# Allegro board mainboard.brd
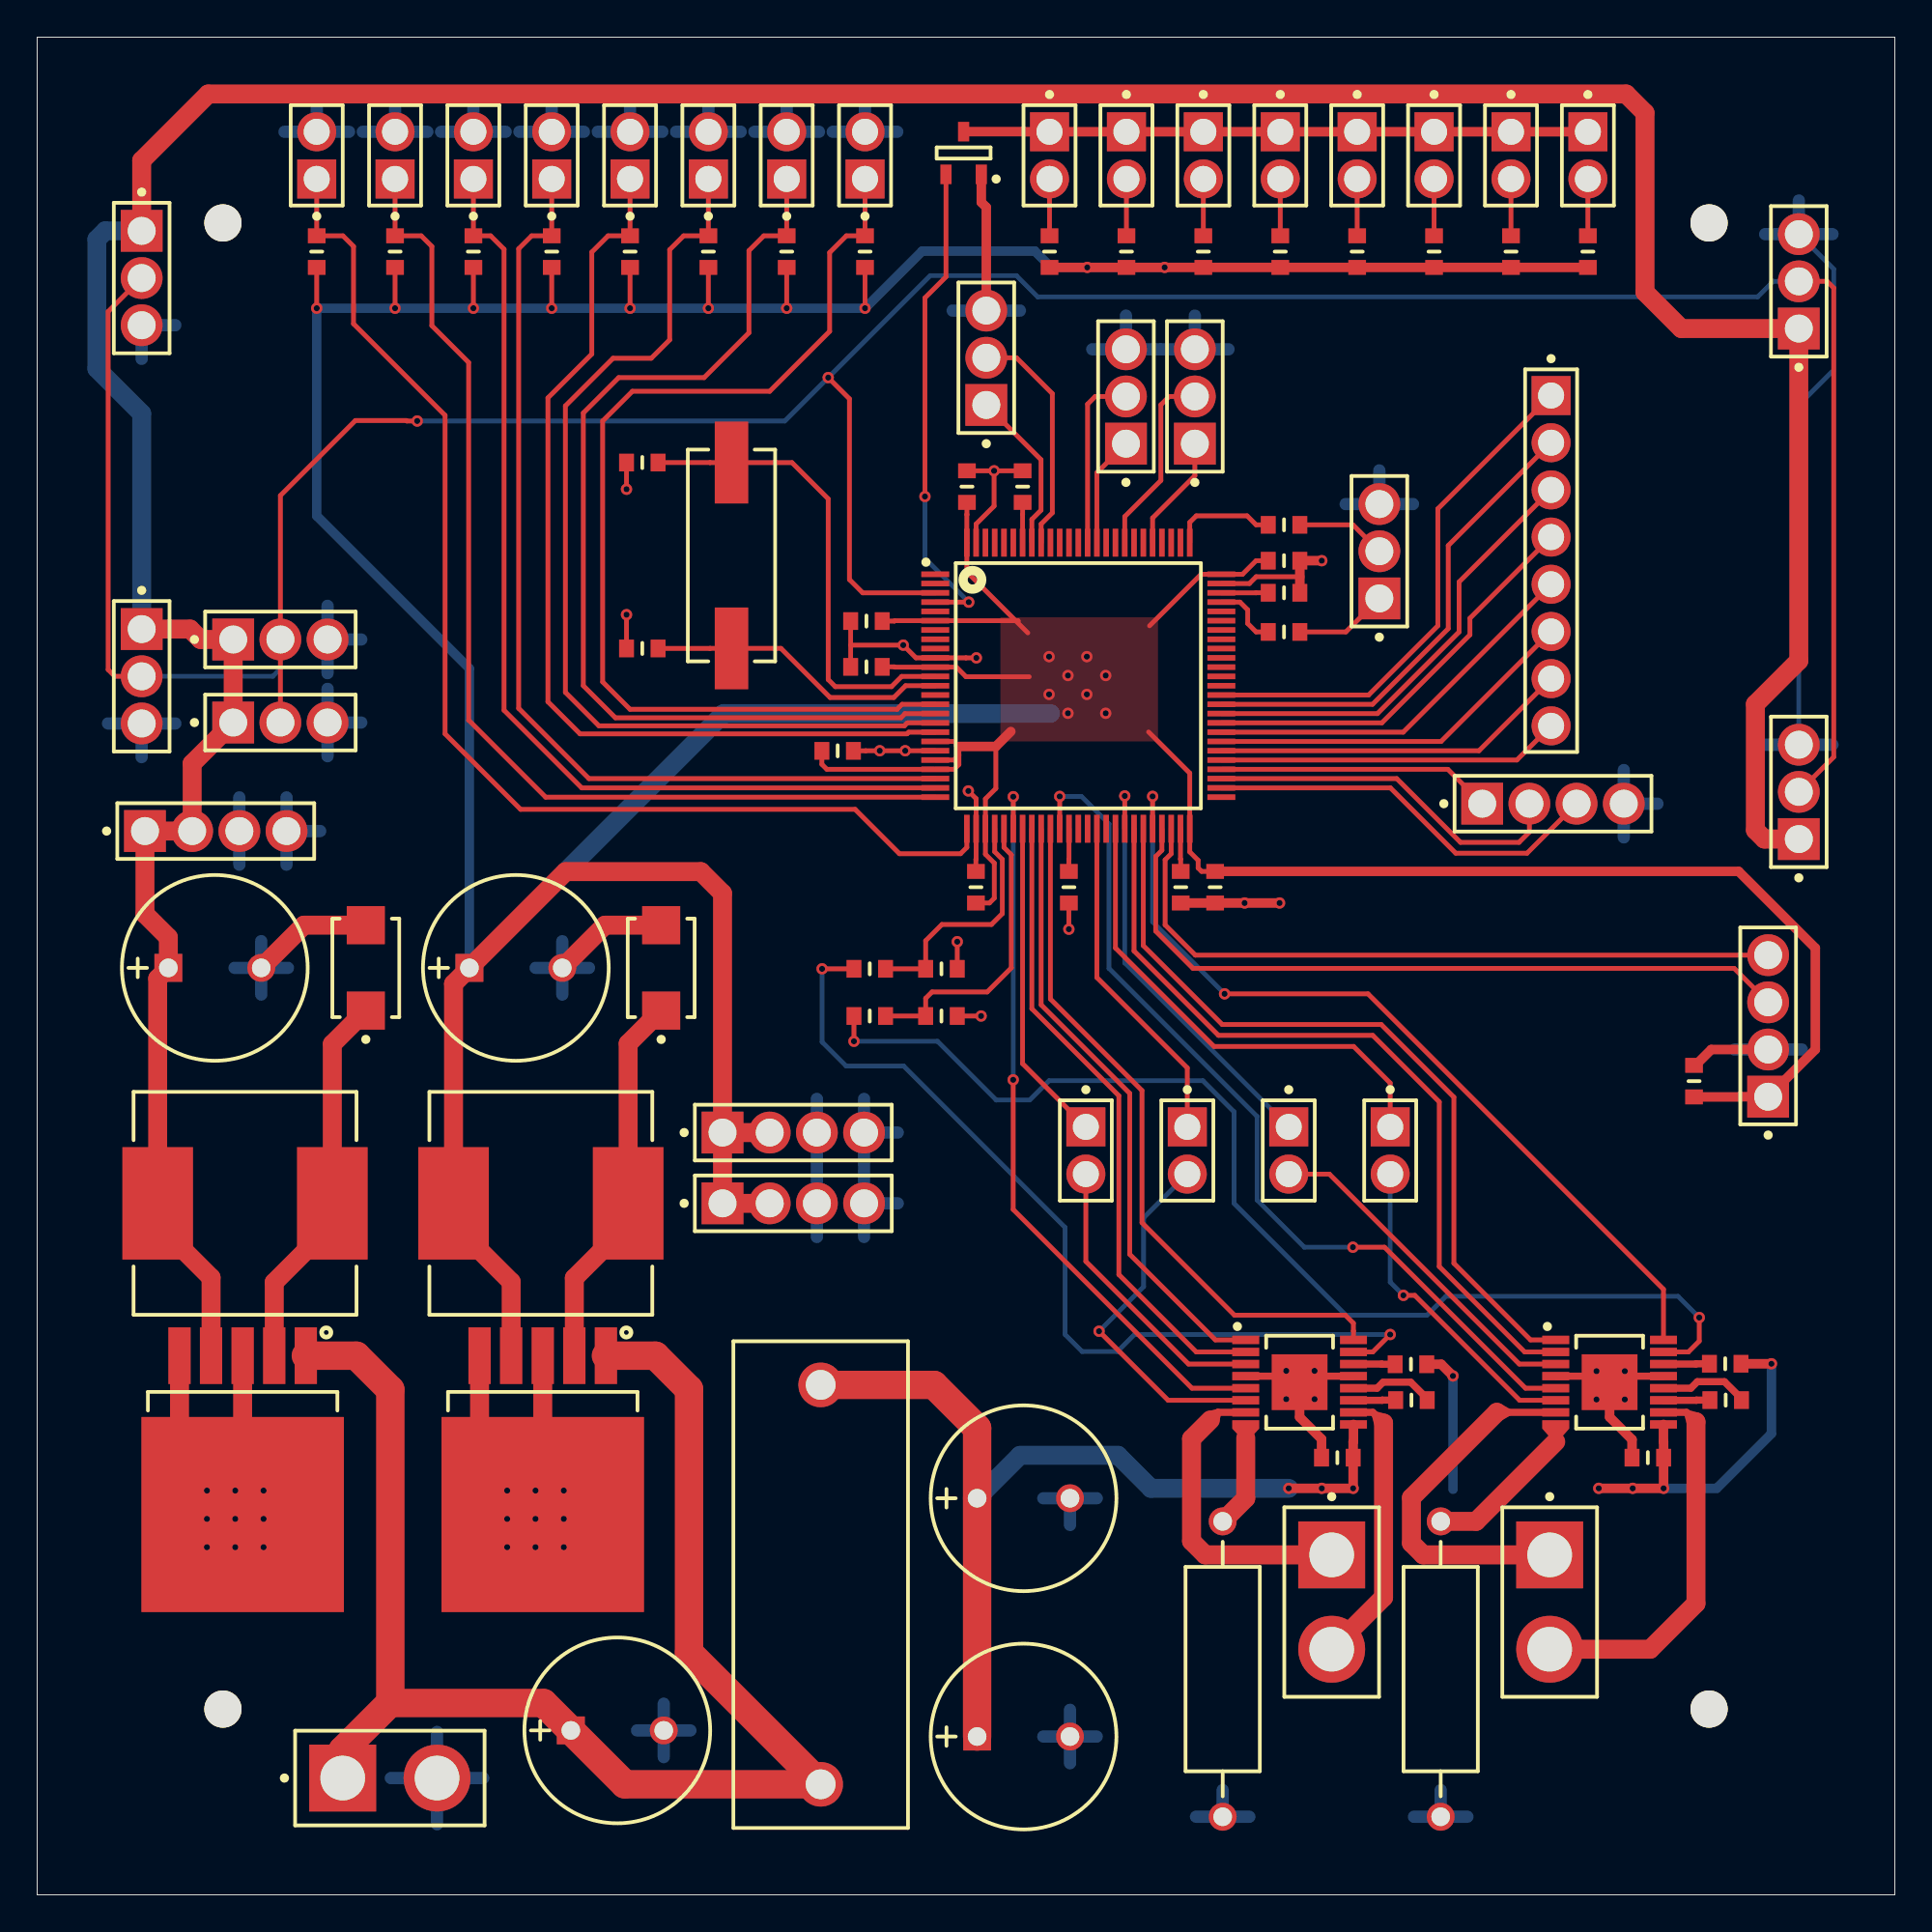
[diagram p0: board, top side]
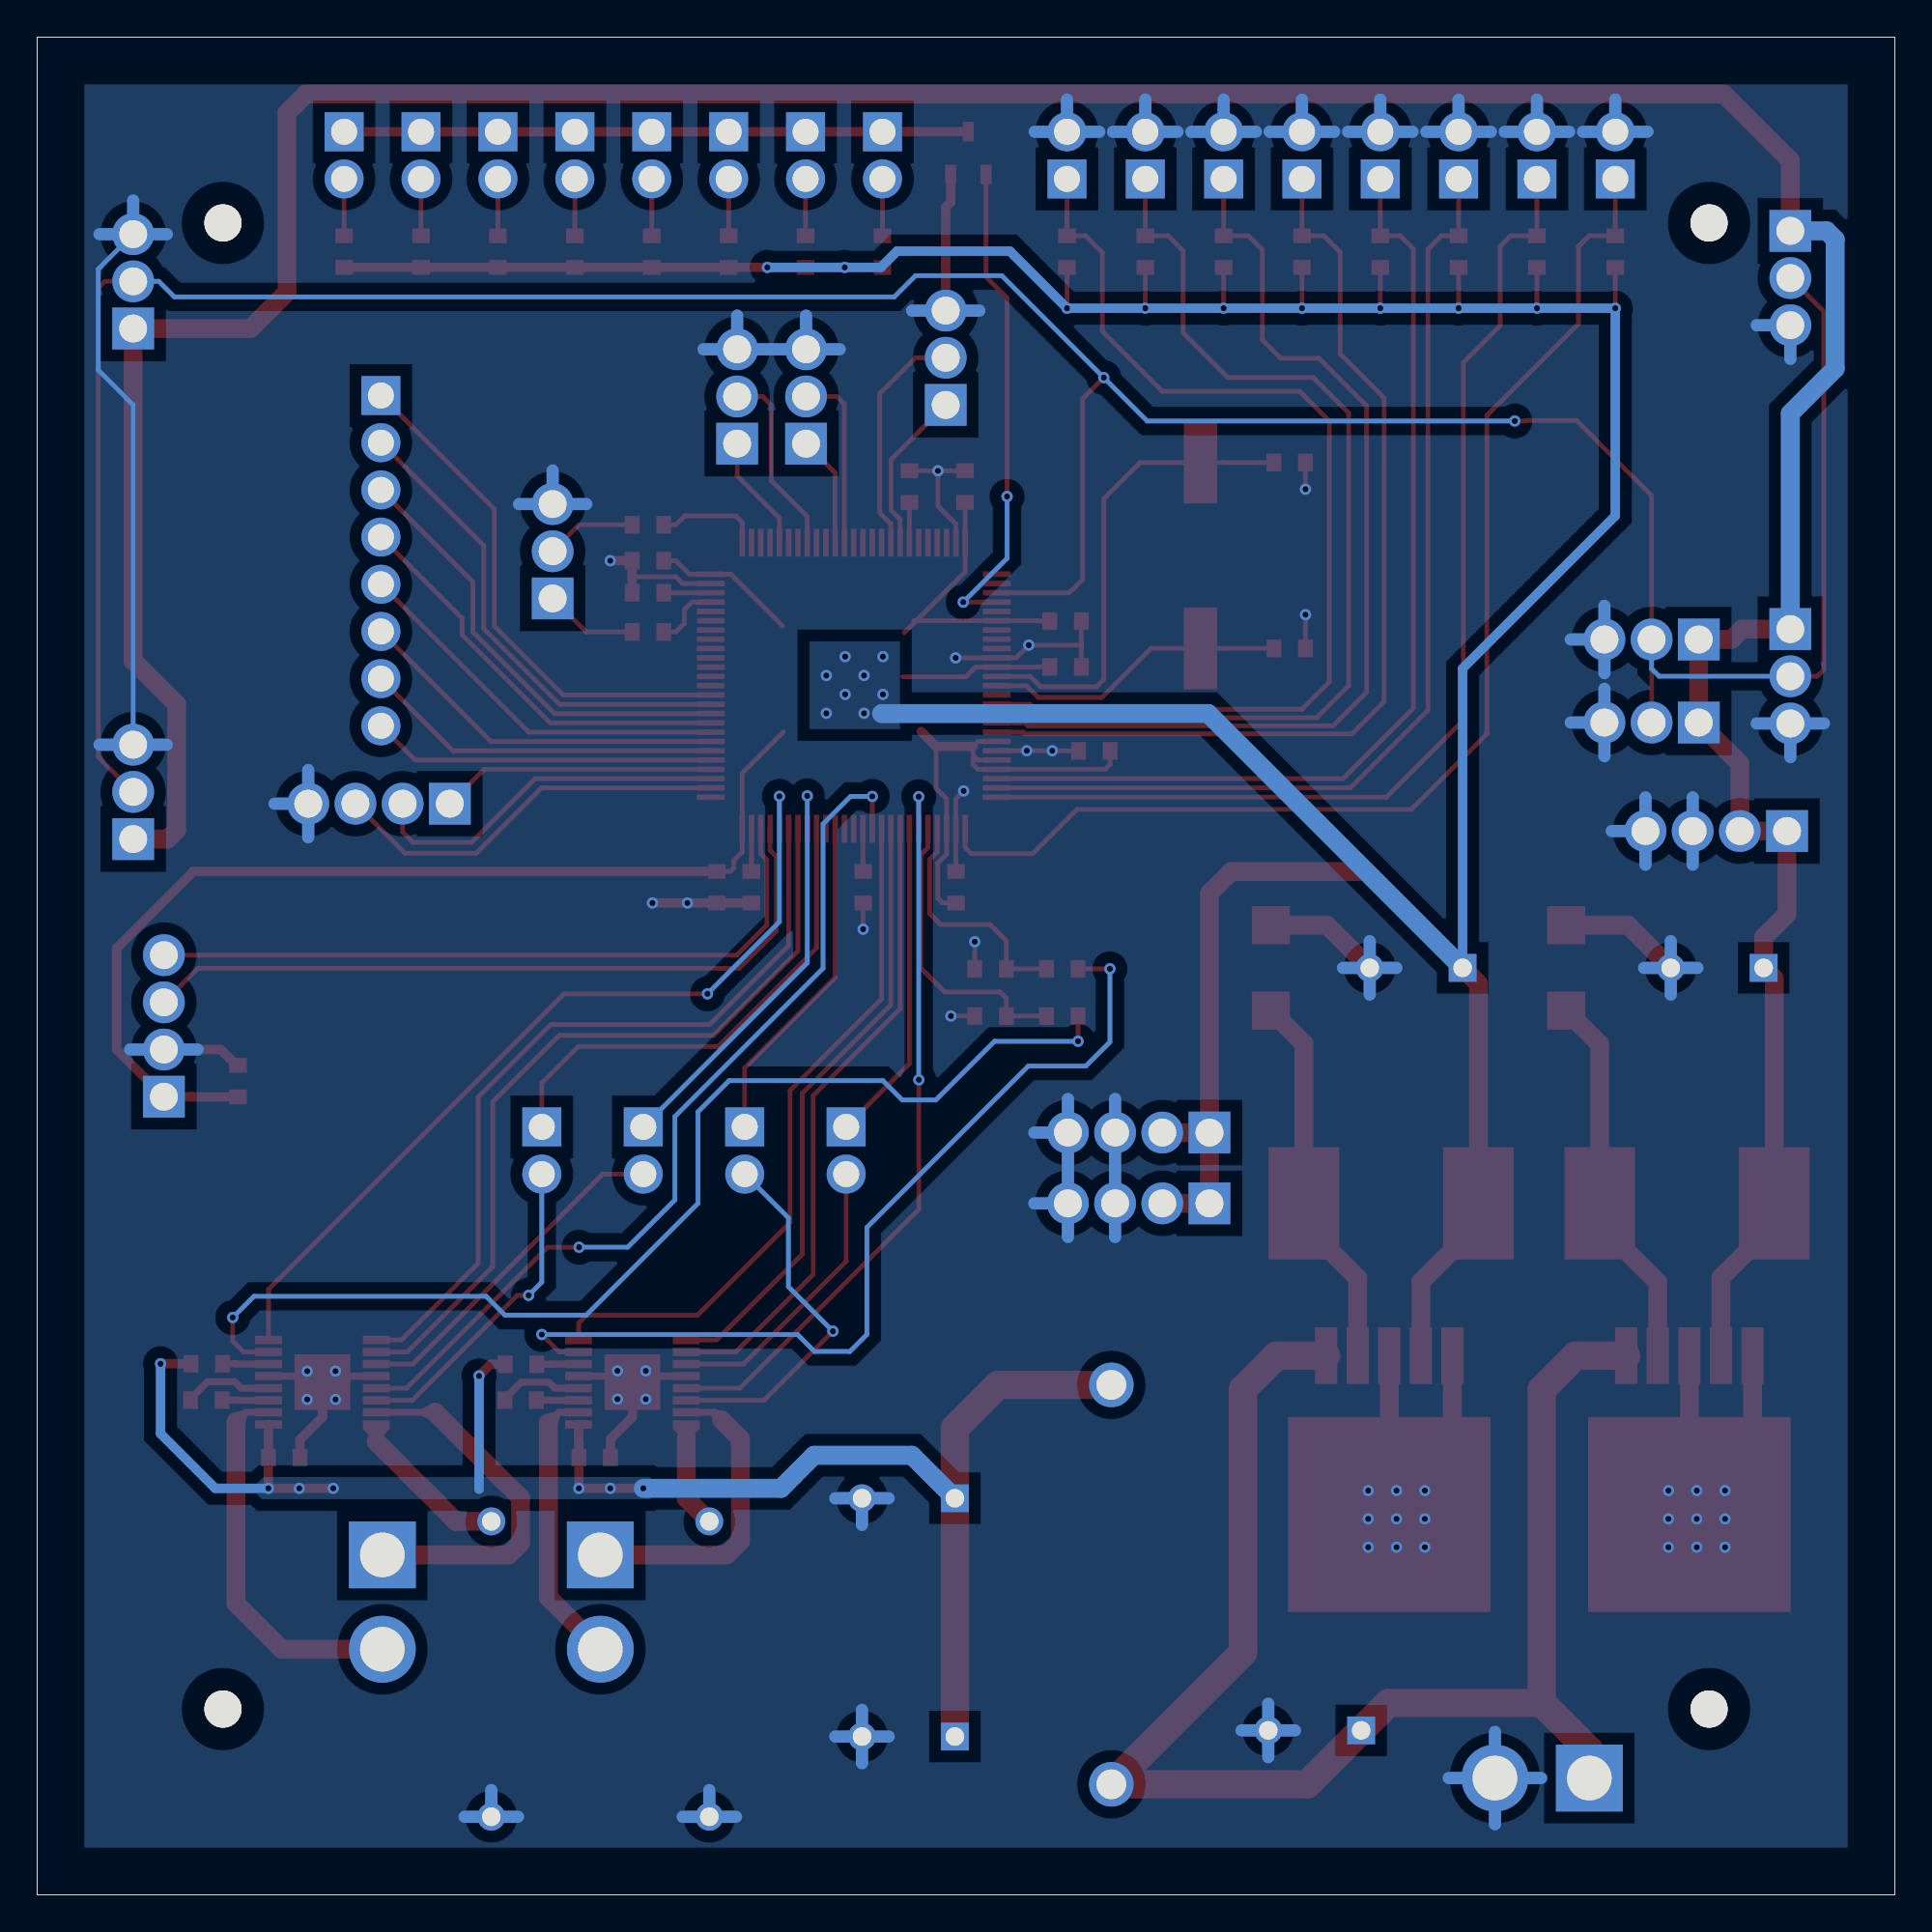
[diagram p1: board, bottom side, seen from below]

Outline 100 x 100 mm; copper layers: TOP, BOTTOM. Coordinates in mm from the lower left corner of the outline.
Outline path: 0,100 100,100 100,0 0,0 0,100

## Placement (name value [footprint] x y rotation side)
C1  104  [CAPC1608X50N]  44.64 68.57 180 top
C2  104  [CAPC1608X50N]  44.64 66.1 180 top
C3  104  [CAPC1608X50N]  43.09 61.58 0 top
C4  104  [CAPC1608X50N]  50.53 54.24 90 top
C5  104  [CAPC1608X50N]  63.41 54.24 270 top
C6  104  [CAPC1608X50N]  67.12 71.82 0 top
C7  104  [CAPC1608X50N]  50.05 75.81 90 top
C8  104  [CAPC1608X50N]  61.56 54.24 270 top
C9  104  [CAPC1608X50N]  67.12 70.09 0 top
C10  20p  [CAPC1608X50N]  32.58 77.1 180 top
C11  20p  [CAPC1608X50N]  32.58 67.09 180 top
C12  680u 25V  [CAPPRD500W70D1000H1700P]  31.23 8.85 0 top
C13  680u  [CAPPRD500W70D1000H1700P]  25.77 49.9 0 top
C14  680u  [CAPPRD500W70D1000H1700P]  9.56 49.9 0 top
C15  104  [CAPC1608X50N]  89.19 43.8 90 top
C16  104  [CAPC1608X50N]  69.99 23.53 180 top
C17  104  [CAPC1608X50N]  86.7 23.53 180 top
C18  104  [CAPC1608X50N]  73.98 26.63 180 top
C19  104  [CAPC1608X50N]  90.89 26.63 180 top
C20  104  [CAPC1608X50N]  73.95 28.56 0 top
C21  104  [CAPC1608X50N]  90.87 28.59 0 top
C22  104  [CAPC1608X50N]  48.68 49.85 0 top
C23  104  [CAPC1608X50N]  48.68 47.31 0 top
C24  680u  [CAPPRD500W70D1000H1700P]  53.1 8.52 0 top
C25  680u  [CAPPRD500W70D1000H1700P]  53.1 21.35 0 top
D1  1N5824  [DIOM5336X244N]  33.59 49.9 90 top
D2  1N5824  [DIOM5336X244N]  17.69 49.9 90 top
D3  LED  [HDRV2W90P254_1X2_508X254X600P]  54.5 94.91 270 top
D4  LED  [HDRV2W90P254_1X2_508X254X600P]  58.64 94.91 270 top
D5  LED  [HDRV2W90P254_1X2_508X254X600P]  62.78 94.91 270 top
D6  LED  [HDRV2W90P254_1X2_508X254X600P]  66.92 94.91 270 top
D7  LED  [HDRV2W90P254_1X2_508X254X600P]  71.06 94.91 270 top
D8  LED  [HDRV2W90P254_1X2_508X254X600P]  75.2 94.91 270 top
D9  LED  [HDRV2W90P254_1X2_508X254X600P]  79.34 94.91 270 top
D10  LED  [HDRV2W90P254_1X2_508X254X600P]  83.48 94.91 270 top
D19  PCELL  [HDRV2W90P254_1X2_508X254X600P]  27.7 92.37 90 top
D20  PCELL  [HDRV2W90P254_1X2_508X254X600P]  23.48 92.37 90 top
D21  PCELL  [HDRV2W90P254_1X2_508X254X600P]  19.27 92.37 90 top
D22  PCELL  [HDRV2W90P254_1X2_508X254X600P]  15.05 92.37 90 top
D23  PCELL  [HDRV2W90P254_1X2_508X254X600P]  44.56 92.37 90 top
D24  PCELL  [HDRV2W90P254_1X2_508X254X600P]  40.35 92.37 90 top
D25  PCELL  [HDRV2W90P254_1X2_508X254X600P]  36.13 92.37 90 top
D26  PCELL  [HDRV2W90P254_1X2_508X254X600P]  31.92 92.37 90 top
F1  FUSE 5A  [FUSRR2150W140L2620T940H1360P]  42.18 16.7 90 top
J1  SWD  [HDRV3W88P254_1X3_762X254X600P]  72.25 69.79 90 top
J2  BATT  [HDRV2W140P508_1X2_1016X508X200P]  16.45 6.29 0 top
J3  MPU9250  [HDRV4W88P254_1X4_1016X254X600P]  93.18 42.96 90 top
J4  CON2  [HDRV2W140P508_1X2_1016X508X200P]  69.68 18.3 270 top
J5  CON2  [HDRV2W140P508_1X2_1016X508X200P]  81.42 18.3 270 top
J6  CON4  [HDRV4W88P254_1X4_1016X254X600P]  36.89 37.22 0 top
J7  CON4  [HDRV4W88P254_1X4_1016X254X600P]  36.89 41.03 0 top
J8  CON3  [HDRV3W88P254_1X3_762X254X600P]  5.63 89.57 270 top
J9  CON3  [HDRV3W88P254_1X3_762X254X600P]  5.63 68.14 270 top
J10  CON3  [HDRV3W88P254_1X3_762X254X600P]  10.55 63.11 0 top
J11  CON3  [HDRV3W88P254_1X3_762X254X600P]  10.55 67.58 0 top
J12  CON3  [HDRV3W88P254_1X3_762X254X600P]  94.83 84.32 90 top
J13  CON3  [HDRV3W88P254_1X3_762X254X600P]  94.83 56.83 90 top
J14  JUMPER  [HDRV2W90P254_1X2_508X254X600P]  61.91 41.34 270 top
J15  JUMPER  [HDRV2W90P254_1X2_508X254X600P]  72.83 41.34 270 top
J16  CON3  [HDRV3W88P254_1X3_762X254X600P]  51.09 80.2 90 top
J17  CON3  [HDRV3W88P254_1X3_762X254X600P]  58.61 78.12 90 top
J18  CON3  [HDRV3W88P254_1X3_762X254X600P]  62.32 78.12 90 top
J19  CON8  [HDRV8W90P254_1X8_2032X254X200P]  81.5 80.71 270 top
J20  CON4  [HDRV4W88P254_1X4_1016X254X600P]  5.8 57.26 0 top
J21  CON4  [HDRV4W88P254_1X4_1016X254X600P]  77.79 58.74 0 top
J22  JUMPER  [HDRV2W90P254_1X2_508X254X600P]  56.45 41.34 270 top
J23  JUMPER  [HDRV2W90P254_1X2_508X254X600P]  67.37 41.34 270 top
L1  33u  [INDM120120X700N]  27.11 37.22 180 top
L2  33u  [INDM120120X700N]  11.19 37.22 180 top
NOREF  -  [unnamed]  90 10 0 top
NOREF#2  -  [unnamed]  10 90 0 top
NOREF#3  -  [unnamed]  10 10 0 top
NOREF#4  -  [unnamed]  90 90 0 top
Q1  SI2302  [SOT95P240X110R-3N]  49.87 93.76 90 top
R1  0  [CAPC1608X50N]  53.05 75.81 270 top
R2  100  [CAPC1608X50N]  67.12 67.98 0 top
R3  100  [CAPC1608X50N]  67.12 73.75 0 top
R4  100  [CAPC1608X50N]  54.5 88.46 90 top
R5  100  [CAPC1608X50N]  58.64 88.46 90 top
R6  100  [CAPC1608X50N]  62.78 88.46 90 top
R7  100  [CAPC1608X50N]  66.92 88.46 90 top
R8  100  [CAPC1608X50N]  71.06 88.46 90 top
R9  100  [CAPC1608X50N]  75.2 88.46 90 top
R10  100  [CAPC1608X50N]  79.34 88.46 90 top
R11  100  [CAPC1608X50N]  83.48 88.46 90 top
R12  0  [CAPC1608X50N]  55.54 54.24 270 top
R13  10k  [CAPC1608X50N]  27.7 88.46 90 top
R14  10k  [CAPC1608X50N]  23.48 88.46 90 top
R15  10k  [CAPC1608X50N]  19.27 88.46 90 top
R16  10k  [CAPC1608X50N]  15.05 88.46 90 top
R17  10k  [CAPC1608X50N]  44.56 88.46 90 top
R18  10k  [CAPC1608X50N]  40.35 88.46 90 top
R19  10k  [CAPC1608X50N]  36.13 88.46 90 top
R20  10k  [CAPC1608X50N]  31.92 88.46 90 top
R21  0.2  [RESAD1590W70L1100D400P]  63.82 12.15 270 top
R22  0.2  [RESAD1590W70L1100D400P]  75.55 12.15 270 top
R23  1k  [CAPC1608X50N]  44.82 49.85 0 top
R24  1k  [CAPC1608X50N]  44.82 47.31 0 top
U1  STM32F407VE  [QFP50P1600X1600X160-100N]  56.05 65.09 0 top
U2  LM2596-3.3  [TO170P1450X465-6N]  27.22 22.87 270 top
U3  LM2596-5.0  [TO170P1450X465-6N]  11.06 22.87 270 top
U4  DRV8801  [SOP65P640X120-17N]  67.96 27.6 0 top
U5  DRV8801  [SOP65P640X120-17N]  84.65 27.6 0 top
Y1  8M  [XTAL1140X473X400N]  37.38 72.1 270 top

## Library data of the parts
C1-C11 C15-C23 = CAP NP
C12-C14 C24 C25 = CAP
D1 D2 = DIODE
D3-D10 = LED
D19-D26 = PDB-C107
F1 = FUSE
J1 J8-J13 J16-J18 = CON3
J2 J4 J5 = CON2
J3 J6 J7 J20 J21 = CON4
J14 J15 J22 J23 = JUMPER
J19 = CON8
L1 L2 = INDUCTOR
Q1 = MOSFET N
R1-R24 = R
U1 = STM32F429VG
U2 U3 = LM2596
U4 U5 = DRV8801
Y1 = CRYSTAL

## Footprints (pads in the part's own frame, mm; a bottom-side part is the same pattern mirrored in y, then rotated)
CAPC1608X50N
  rect 0.8x0.95 smd: 1(-0.85,0) 2(0.85,0)
CAPPRD500W70D1000H1700P
  rect 1.5x1.5 hole 1: 1(-2.5,0)
  round 1.5 hole 1: 2(2.5,0)
DIOM5336X244N
  rect 2.05x2.05 smd: 1(-2.3,0) 2(2.3,0)
FUSRR2150W140L2620T940H1360P
  round 2.4 hole 1.6: 1(-10.75,0) 2(10.75,0)
HDRV2W90P254_1X2_508X254X600P
  rect 2.1x2.1 hole 1.4: 1(0,0)
  round 2.1 hole 1.4: 2(2.54,0)
HDRV2W140P508_1X2_1016X508X200P
  rect 3.6x3.6 hole 2.4: 1(0,0)
  round 3.6 hole 2.4: 2(5.08,0)
HDRV3W88P254_1X3_762X254X600P
  rect 2.25x2.25 hole 1.5: 1(0,0)
  round 2.25 hole 1.5: 2(2.54,0) 3(5.08,0)
HDRV4W88P254_1X4_1016X254X600P
  rect 2.25x2.25 hole 1.5: 1(0,0)
  round 2.25 hole 1.5: 2(2.54,0) 3(5.08,0) 4(7.62,0)
HDRV8W90P254_1X8_2032X254X200P
  rect 2.1x2.1 hole 1.4: 1(0,0)
  round 2.1 hole 1.4: 2(2.54,0) 3(5.08,0) 4(7.62,0) 5(10.16,0) 6(12.7,0) 7(15.24,0) 8(17.78,0)
INDM120120X700N
  rect 3.8x6.05 smd: 1(-4.7,0) 2(4.7,0)
QFP50P1600X1600X160-100N
  rect 1.5x0.3 smd: 1(-7.7,6) 2(-7.7,5.5) 3(-7.7,5) 4(-7.7,4.5) 5(-7.7,4) 6(-7.7,3.5) 7(-7.7,3) 8(-7.7,2.5) 9(-7.7,2) 10(-7.7,1.5) 11(-7.7,1) 12(-7.7,0.5) 13(-7.7,0) 14(-7.7,-0.5) 15(-7.7,-1) 16(-7.7,-1.5) 17(-7.7,-2) 18(-7.7,-2.5) 19(-7.7,-3) 20(-7.7,-3.5) 21(-7.7,-4) 22(-7.7,-4.5) 23(-7.7,-5) 24(-7.7,-5.5) 25(-7.7,-6) 51(7.7,-6) 52(7.7,-5.5) 53(7.7,-5) 54(7.7,-4.5) 55(7.7,-4) 56(7.7,-3.5) 57(7.7,-3) 58(7.7,-2.5) 59(7.7,-2) 60(7.7,-1.5) 61(7.7,-1) 62(7.7,-0.5) 63(7.7,0) 64(7.7,0.5) 65(7.7,1) 66(7.7,1.5) 67(7.7,2) 68(7.7,2.5) 69(7.7,3) 70(7.7,3.5) 71(7.7,4) 72(7.7,4.5) 73(7.7,5) 74(7.7,5.5) 75(7.7,6)
  rect 0.3x1.5 smd: 26(-6,-7.7) 27(-5.5,-7.7) 28(-5,-7.7) 29(-4.5,-7.7) 30(-4,-7.7) 31(-3.5,-7.7) 32(-3,-7.7) 33(-2.5,-7.7) 34(-2,-7.7) 35(-1.5,-7.7) 36(-1,-7.7) 37(-0.5,-7.7) 38(0,-7.7) 39(0.5,-7.7) 40(1,-7.7) 41(1.5,-7.7) 42(2,-7.7) 43(2.5,-7.7) 44(3,-7.7) 45(3.5,-7.7) 46(4,-7.7) 47(4.5,-7.7) 48(5,-7.7) 49(5.5,-7.7) 50(6,-7.7) 76(6,7.7) 77(5.5,7.7) 78(5,7.7) 79(4.5,7.7) 80(4,7.7) 81(3.5,7.7) 82(3,7.7) 83(2.5,7.7) 84(2,7.7) 85(1.5,7.7) 86(1,7.7) 87(0.5,7.7) 88(0,7.7) 89(-0.5,7.7) 90(-1,7.7) 91(-1.5,7.7) 92(-2,7.7) 93(-2.5,7.7) 94(-3,7.7) 95(-3.5,7.7) 96(-4,7.7) 97(-4.5,7.7) 98(-5,7.7) 99(-5.5,7.7) 100(-6,7.7)
RESAD1590W70L1100D400P
  round 1.5 hole 1: 1(-7.95,0) 2(7.95,0)
SOP65P640X120-17N
  rect 1.45x0.45 smd: 1(-2.9,2.275) 2(-2.9,1.625) 3(-2.9,0.975) 4(-2.9,0.325) 5(-2.9,-0.325) 6(-2.9,-0.975) 7(-2.9,-1.625) 8(-2.9,-2.275) 9(2.9,-2.275) 10(2.9,-1.625) 11(2.9,-0.975) 12(2.9,-0.325) 13(2.9,0.325) 14(2.9,0.975) 15(2.9,1.625) 16(2.9,2.275)
  rect 3x3 smd: 17(0,0)
SOT95P240X110R-3N
  rect 1.05x0.6 smd: 1(-1.15,0.95) 2(1.15,0) 3(-1.15,-0.95)
TO170P1450X465-6N
  rect 3.05x1.2 smd: 1(-6.15,3.4) 2(-6.15,1.7) 3(-6.15,0) 4(-6.15,-1.7) 5(-6.15,-3.4)
  rect 10.5x10.9 smd: 6(2.4,0)
unnamed
  round 2 hole 3 unplated: (0,0)
XTAL1140X473X400N
  rect 4.4x1.8 smd: 1(-5,0) 2(5,0)

## Nets
3V3: C1.1 C2.1 C3.1 C4.1 C5.1 C6.1 C7.1 C13.1 C15.1 J3.1 J6.1 J6.2 J7.1 J7.2 L1.2 R4.1 R5.1 R6.1 R7.1 R8.1 R9.1 R10.1 R11.1 R13.1 R14.1 R15.1 R16.1 R17.1 R18.1 R19.1 R20.1 U1.6(VBAT) U1.11(VDD#11) U1.19(VDD#19) U1.21(VREF+) U1.22(VDDA) U1.28(VDD#28) U1.50(VDD#50) U1.75(VDD#75) U1.100(VDD#100) U2.4(FB)
5V: C14.1 J8.1 J9.1 J10.1 J11.1 J12.1 J13.1 J20.1 J20.2 L2.2 U3.4(FB)
11V1: C16.1 C17.1 C20.2 C21.2 C24.1 C25.1 F1.2 U4.9(VBB) U5.9(VBB)
0: C1.2 C2.2 C3.2 C4.2 C5.2 C6.2 C7.2 C8.2 C9.2 C10.2 C11.2 C12.2 C13.2 C14.2 C15.2 C16.2 C17.2 C22.2 C23.2 C24.2 C25.2 D1.2(A) D2.2(A) D19.2(ANODE) D20.2(ANODE) D21.2(ANODE) D22.2(ANODE) D23.2(ANODE) D24.2(ANODE) D25.2(ANODE) D26.2(ANODE) J1.3 J2.2 J3.2 J6.3 J6.4 J7.3 J7.4 J8.3 J9.3 J10.3 J11.3 J12.3 J13.3 J16.3 J17.3 J18.3 J20.3 J20.4 J21.4 Q1.3(SOURCE) R1.1 R12.2 R21.2 R22.2 U1.10(VSS#10) U1.20(VSSA) U1.27(VSS#27) U1.74(VSS#74) U1.99(VSS#99) U2.3(GND) U2.5(ON) U2.6(TGND) U3.3(GND) U3.5(ON) U3.6(TGND) U4.4(GND#4) U4.13(GND#13) U4.17(GND#17) U5.4(GND#4) U5.13(GND#13) U5.17(GND#17)
ADC0: D19.1(CATHODE) R13.2 U1.23
ADC1: D20.1(CATHODE) R14.2 U1.24
ADC2: D21.1(CATHODE) R15.2 U1.25
ADC3: D22.1(CATHODE) R16.2 U1.26
ADC4: C22.1 R23.2 U1.29
ADC5: C23.1 R24.2 U1.30
ADC10: D23.1(CATHODE) R17.2 U1.15
ADC11: D24.1(CATHODE) R18.2 U1.16
ADC12: D25.1(CATHODE) R19.2 U1.17
ADC13: D26.1(CATHODE) R20.2 U1.18
I2C1_SCL: J16.2 U1.92
I2C1_SDA: J16.1 U1.93
I2C2_SCL: J3.3 U1.47
I2C2_SDA: J3.4 U1.48
NRST: U1.14(NRST)
PA6: U1.31 U4.5(NSLEEP)
PA7: J22.1 U1.32
PB0: U1.35 U4.16(MODE2)
PB1: U1.36 U5.5(NSLEEP)
PC4: U1.33 U4.2(MODE1)
PC5: U1.34 U4.1(NFAULT)
PD8: J19.8 U1.55
PD9: J19.7 U1.56
PD10: J19.6 U1.57
PD11: J19.5 U1.58
PD12: J19.4 U1.59
PD13: J19.3 U1.60
PD14: J19.2 U1.61
PD15: J19.1 U1.62
PE4: J8.2 J9.2 J10.2 J11.2 J12.2 J13.2 U1.3
PE5: Q1.1(GATE) U1.4
PE12: J23.1 U1.43
PE13: U1.44 U5.2(MODE1)
PE14: U1.45 U5.1(NFAULT)
PE15: U1.46 U5.16(MODE2)
SPI2_MISO: J21.2 U1.53
SPI2_MOSI: J21.1 U1.54
SPI2_SCK: J21.3 U1.52
SWCLK: R3.1 U1.76
SWDIO: R2.1 U1.72
TIM1_CH1: J14.1 U1.40
TIM1_CH2: J15.1 U1.42
UART5_RX: J18.2 U1.83
UART5_TX: J18.1 U1.80
USART2_RX: J17.2 U1.87
USART2_TX: J17.1 U1.86
N01350: C10.1 U1.12 Y1.1
N01406: C11.1 U1.13 Y1.2
N02191: C9.1 U1.73(VCAP_2)
N02195: C8.1 U1.49(VCAP_1)
N04292: R1.2 U1.94(BOOT0)
N05431: J1.1 R2.2
N05435: J1.2 R3.2
N06205: C12.1 F1.1 J2.1 U2.1(VIN) U3.1(VIN)
N06618: D1.1(K) L1.1 U2.2(OUT)
N06726: D2.1(K) L2.1 U3.2(OUT)
N07337: D3.1(CATHODE) D4.1(CATHODE) D5.1(CATHODE) D6.1(CATHODE) D7.1(CATHODE) D8.1(CATHODE) D9.1(CATHODE) D10.1(CATHODE) Q1.2(DRAIN)
N09789: R12.1 U1.37(PB2_BOOT1)
N11361: J5.2 U5.10(OUT-)
N16090: D10.2(ANODE) R11.2
N16092: D9.2(ANODE) R10.2
N16094: D8.2(ANODE) R9.2
N16096: D7.2(ANODE) R8.2
N16098: D6.2(ANODE) R7.2
N16100: D5.2(ANODE) R6.2
N16102: D4.2(ANODE) R5.2
N16104: D3.2(ANODE) R4.2
N18815: J4.2 U4.10(OUT-)
N18883: J4.1 U4.7(OUT+)
N19043: R23.1 U4.15(VPROPI)
N19047: R24.1 U5.15(VPROPI)
N19140: R21.1 U4.8(SENSE)
N19165: R22.1 U5.8(SENSE)
N19192: J5.1 U5.7(OUT+)
N19500: C18.2 U4.11(CP1)
N19504: C18.1 U4.12(CP2)
N19667: C19.1 U5.12(CP2)
N19671: C19.2 U5.11(CP1)
N19839: C20.1 U4.14(VCP)
N19843: C21.1 U5.14(VCP)
N24901: J14.2 U4.6(ENABLE)
N24909: J15.2 U5.6(ENABLE)
N35338: J22.2 U4.3(PHASE)
N35360: J23.2 U5.3(PHASE)

Pads without a net: U1 1 2 5 7 8 9 38 39 41 51 63 64 65 66 67 68 69 70 71 77 78 79 81 82 84 85 88 89 90 91 95 96 97 98

## Via types
v1: diameter 0.61, hole 0.33, TOP to BOTTOM, 83 vias

## Routing (per net, layer and track width the routed paths; a pad name or vN(x,y) marks a point on that pad's centre or on a via; arc(x,y) is an arc through that point)
3V3: length 343.3
  TOP w0.254: 59.88,68.31 62.65,71.09 U1.75 64.88,71.09 65.62,71.82 C6.1 ; U1.19 49.35,62.09 49.62,61.82 49.62,61.35 ; 53.4,65.57 50,65.57 49.48,66.09 U1.11 46.16,66.09 46.14,66.1 C2.1 ; 59.83,62.6 62.05,60.38 U1.50 62.05,56.14 62.5,55.69 62.5,55.28 62.68,55.09 C5.1 ; U1.21 49.35,61.09 49.62,61.35 ; R13.1 v1(27.7,85.41) ; R15.1 v1(19.27,85.41) ; 49.62,61.35 49.62,60.85 49.36,60.59 U1.22 42.51,60.59 42.24,60.86 C3.1 ; R14.1 v1(23.48,85.41) ; R16.1 v1(15.05,85.41) ; R19.1 v1(36.13,85.41) ; R17.1 v1(44.56,85.41) ; 53.33,67.93 50.05,71.21 U1.100 50.05,74.3 50.05,74.3 C7.1 ; 51.61,61.82 51.61,59.56 51.05,59 U1.28 51.05,56.02 51.52,55.54 51.52,53.65 51.26,53.39 C4.1 ; 52.82,68.57 52.8,68.59 U1.6 46.16,68.59 46.14,68.57 C1.1 ; R20.1 v1(31.92,85.41) ; R18.1 v1(40.35,85.41)
  TOP w0.508: R4.1 v1(56.53,87.61) R5.1 v1(60.69,87.61) R6.1 R7.1 R8.1 R9.1 R10.1 R11.1 ; C15.1 91.66,42.95 91.67,42.96 J3.1 95.72,45.5 95.72,50.97 91.59,55.09 C5.1 ; 49.62,61.82 51.61,61.82 52.41,62.62
  TOP w1.016: J7.1 36.89,53.91 35.73,55.08 28.45,55.08 C13.1 22.41,49.04 L1.2 22.41,36.1 25.52,33 U2.4 ; J7.1 J7.2 ; J7.1 J6.1 J6.2
  BOTTOM w0.508: v1(60.69,87.61) v1(56.53,87.61) 54.58,87.61 53.71,88.48 47.64,88.48 v1(44.56,85.41) v1(40.35,85.41) v1(36.13,85.41) v1(31.92,85.41) v1(27.7,85.41) v1(23.48,85.41) v1(19.27,85.41) v1(15.05,85.41) 15.05,74.23 23.27,66.01 C13.1
  BOTTOM w1.016: C13.1 36.96,63.59 54.55,63.59
  vias: v1(54.47,66.65) v1(54.47,64.62) v1(55.49,65.64) v1(55.49,63.6) v1(56.5,66.65) v1(56.5,64.62) v1(57.52,65.64) v1(57.52,63.6)
5V: length 209.6
  TOP w1.016: J8.1 5.63,93.36 9.21,96.94 85.53,96.94 86.55,95.92 86.55,86.27 88.51,84.32 J12.1 94.83,66.43 92.49,64.1 92.49,57.32 92.98,56.83 J13.1 ; J9.1 8.23,68.14 8.79,67.58 J11.1 J10.1 8.34,60.9 J20.2 J20.1 5.8,52.8 7.06,51.54 C14.1 6.49,49.32 L2.2 6.49,36.1 9.36,33.23 U3.4
  BOTTOM w1.016: J8.1 3.67,89.57 3.21,89.12 3.21,82.16 5.63,79.74 J9.1
11V1: length 78.5
  TOP w0.508: v1(84.06,21.88) v1(85.89,21.88) v1(87.55,21.88) C17.1 87.55,24.39 87.55,24.4 U5.9 ; v1(67.37,21.88) v1(69.15,21.88) v1(70.84,21.88) C16.1 70.84,24.39 70.86,24.41 U4.9 ; C21.2 v1(93.36,28.59) ; C20.2 75.58,28.56 v1(76.21,27.93)
  TOP w1.524: F1.2 48.27,27.45 50.6,25.12 C25.1 C24.1
  BOTTOM w0.508: v1(93.36,28.59) 93.36,24.83 90.41,21.88 v1(87.55,21.88) ; v1(76.21,27.93) 76.21,21.83
  BOTTOM w1.016: v1(67.37,21.88) 59.96,21.88 58.18,23.66 52.91,23.66 C25.1
0: length 330.3
  TOP w0.254: C10.2 v1(31.73,75.67) ; v1(50.56,66.59) 50,66.59 50,66.59 U1.10 47.31,66.59 v1(46.62,67.27) 43.79,67.27 ; 43.79,67.27 C1.2 ; 43.79,67.27 C2.2 ; U1.74 65.25,70.59 65.62,70.95 67.97,70.95 ; U1.20 v1(46.73,61.59) v1(45.36,61.59) 44.6,61.59 44.6,61.58 C3.2 ; C7.2 v1(51.51,76.66) ; v1(51.51,76.66) 51.51,74.76 50.54,73.79 U1.99 ; v1(51.51,76.66) R1.1 ; v1(50.13,59.42) 50.54,59.01 U1.27 50.54,55.76 50.53,55.75 C4.2 ; C22.2 v1(49.53,51.31) ; R12.2 v1(55.54,51.98) ; C23.2 v1(50.81,47.31) ; C11.2 v1(31.73,68.91)
  TOP w0.381: U5.4 84.32,27.92 U5.17 84.97,27.92 U5.13 ; U4.13 68.28,27.92 U4.17 67.63,27.92 U4.4
  TOP w0.508: J16.3 51.09,90.84 50.82,91.11 Q1.3 ; C17.2 85.85,24.51 84.65,25.72 U5.17 ; C9.2 C6.2 v1(69.15,71.82) ; C16.2 69.14,24.53 67.96,25.72 U4.17 ; C15.2 89.27,44.65 90.12,45.5 J3.2 ; v1(66.88,53.39) v1(65,53.39) C5.2 C8.2
  TOP w1.016: C13.2 30.57,52.2 D1.2 ; U2.5 23.82,23.87 U2.6 U2.3 ; D2.2 14.36,52.2 C14.2 ; U3.3 U3.6 7.66,23.87 U3.5
  BOTTOM w0.254: J12.3 96.71,87.52 96.71,82.08 94.83,80.2 J13.3
  BOTTOM w0.66: 54.16,21.35 C25.2 ; C25.2 57.04,21.35 ; C25.2 55.6,19.91 ; R21.2 65.25,4.2 ; R21.2 62.38,4.2 ; R21.2 63.82,5.64 ; 5.63,61.24 J9.3 ; J9.3 7.44,63.06 ; J9.3 3.81,63.06 ; 54.16,8.52 C24.2 ; C24.2 57.04,8.52 ; C24.2 55.6,7.09 ; C24.2 55.6,9.96 ; J1.3 72.25,76.68 ; J1.3 74.06,74.87 ; J1.3 70.44,74.87 ; 34.4,94.91 D25.2 ; D25.2 37.87,94.91 ; D25.2 36.13,96.64 ; 38.61,94.91 D24.2 ; D24.2 40.35,96.64 ; D24.2 42.08,94.91 ; 25.96,94.91 D19.2 ; D19.2 27.7,96.64 ; D19.2 29.44,94.91 ; C13.2 28.27,51.33 ; C13.2 26.83,49.9 ; C13.2 28.27,48.46 ; C13.2 29.7,49.9 ; D20.2 23.48,96.64 ; D20.2 25.22,94.91 ; D20.2 21.75,94.91 ; J7.4 46.32,41.03 ; J7.4 44.51,39.22 ; J7.4 44.51,42.84 ; J21.4 85.41,60.55 ; J21.4 87.22,58.74 ; J21.4 85.41,56.93 ; 10.88,59.08 J20.3 10.88,55.45 ; J11.3 17.44,67.58 ; J11.3 15.63,65.77 ; J11.3 15.63,69.39 ; J20.4 15.24,57.26 ; J20.4 13.42,55.45 ; J20.4 13.42,59.08 ; 32.29,8.85 C12.2 ; C12.2 35.17,8.85 ; C12.2 33.73,10.29 ; C12.2 33.73,7.42 ; 44.51,35.41 J6.4 ; J6.4 44.51,39.03 ; J6.4 46.32,37.22 ; D22.2 16.79,94.91 ; D22.2 15.05,96.64 ; D22.2 13.31,94.91 ; 96.64,61.91 J13.3 93.02,61.91 ; 10.63,49.9 C14.2 ; C14.2 12.06,51.33 ; C14.2 13.5,49.9 ; C14.2 12.06,48.46 ; 41.97,39.22 J7.3 41.97,42.84 ; D26.2 31.92,96.64 ; D26.2 33.65,94.91 ; D26.2 30.18,94.91 ; 21.53,3.8 J2.2 ; J2.2 24.01,6.29 ; J2.2 21.53,8.77 ; J2.2 19.04,6.29 ; R22.2 75.55,5.64 ; R22.2 74.12,4.2 ; R22.2 76.99,4.2 ; J12.3 96.64,89.4 ; J12.3 93.02,89.4 ; J12.3 94.83,91.21 ; D21.2 19.27,96.64 ; D21.2 21,94.91 ; D21.2 17.53,94.91 ; 41.97,35.41 J6.3 41.97,39.03 ; 94.99,45.5 J3.2 91.37,45.5 ; J17.3 60.42,83.2 ; J17.3 58.61,85.01 ; J17.3 56.8,83.2 ; D23.2 44.56,96.64 ; D23.2 46.3,94.91 ; D23.2 42.83,94.91 ; J10.3 15.63,64.92 ; J10.3 17.44,63.11 ; J10.3 15.63,61.3 ; J18.3 62.32,85.01 ; J18.3 60.51,83.2 ; J18.3 64.13,83.2 ; 49.28,85.28 J16.3 52.9,85.28 ; 7.44,84.49 J8.3 5.63,82.68
  vias: v1(9.14,21.76) v1(9.14,20.24) v1(9.14,18.71) v1(10.66,21.76) v1(10.66,20.24) v1(10.66,18.71) v1(12.19,21.76) v1(12.19,20.24) v1(12.19,18.71) v1(25.3,21.76) v1(25.3,20.24) v1(25.3,18.71) v1(26.83,21.76) v1(26.83,20.24) v1(26.83,18.71) v1(28.35,21.76) v1(28.35,20.24) v1(28.35,18.71) v1(67.24,28.21) v1(67.24,26.68) v1(68.76,28.21) v1(68.76,26.68) v1(83.94,28.19) v1(83.94,26.67) v1(85.46,28.19) v1(85.46,26.67)
ADC0: length 53.9
  TOP w0.254: U1.23 29.7,60.09 25.92,63.87 25.92,88.61 26.62,89.31 R13.2 D19.1
ADC1: length 54.8
  TOP w0.254: D20.1 R14.2 24.41,89.31 25.13,88.58 25.13,63.77 29.31,59.59 U1.24
ADC2: length 58.4
  TOP w0.254: D21.1 R15.2 20.68,89.31 21.25,88.73 21.25,84.47 23.23,82.49 23.23,63.23 27.37,59.09 U1.25
ADC3: length 65.5
  TOP w0.254: U1.26 50.05,56.38 49.71,56.05 46.42,56.05 44.03,58.43 26.02,58.43 21.96,62.5 21.96,79.64 17.03,84.57 17.03,88.73 16.46,89.31 R16.2 D22.1
ADC4: length 13.1
  TOP w0.254: U1.29 51.54,56.15 51.96,55.74 51.96,52.82 51.37,52.24 48.7,52.24 47.83,51.36 C22.1 R23.2
ADC5: length 16.1
  TOP w0.254: R24.2 C23.1 47.83,48.26 48.17,48.6 51.14,48.6 52.44,49.9 52.44,55.99 52.05,56.38 U1.30
ADC10: length 56.5
  TOP w0.254: U1.15 46.56,64.09 46.29,63.82 31.92,63.82 30.44,65.29 30.44,79.34 32.04,80.94 39.43,80.94 42.66,84.16 42.66,88.4 43.56,89.31 R17.2 D23.1
ADC11: length 55
  TOP w0.254: D24.1 R18.2 39.11,89.31 38.32,88.51 38.32,84.09 35.9,81.67 31.31,81.67 29.4,79.77 29.4,65.09 31.13,63.36 46.49,63.36 46.72,63.59 U1.16
ADC12: length 53.5
  TOP w0.254: D25.1 R19.2 34.8,89.31 34.05,88.56 34.05,83.71 33.06,82.72 31,82.72 28.44,80.15 28.44,64.73 30.24,62.93 46.68,62.93 46.84,63.09 U1.17
ADC13: length 52.3
  TOP w0.254: U1.18 46.92,62.59 46.82,62.5 29.22,62.5 27.5,64.22 27.5,80.58 29.86,82.94 29.86,88.43 30.73,89.31 R20.2 D26.1
I2C1_SCL: length 12.6
  TOP w0.254: J16.2 52.72,82.74 54.65,80.81 54.65,74.39 54.05,73.79 U1.92
I2C1_SDA: length 8.8
  TOP w0.254: U1.93 53.54,74.04 54.04,74.54 54.04,77.25 J16.1
I2C2_SCL: length 40.2
  TOP w0.254: U1.47 60.55,56.23 60.21,55.89 60.21,51.88 62.22,49.87 91.35,49.87 J3.3
I2C2_SDA: length 38.4
  TOP w0.254: U1.48 61.05,56.04 60.72,55.71 60.72,52.21 62.34,50.58 J3.4
PA6: length 40.5
  TOP w0.254: U4.5 62.16,27.27 52.54,36.89 v1(52.54,43.87) ; U1.31 v1(52.54,59.11)
  BOTTOM w0.254: v1(52.54,43.87) 52.54,43.88 v1(52.54,59.11)
PA7: length 17.5
  TOP w0.254: J22.1 53.05,44.74 U1.32
PB0: length 37.8
  TOP w0.254: U1.35 54.54,48.22 59.47,43.29 59.47,36.18 64.45,31.2 70.42,31.2 70.85,30.77 70.85,30.36 70.86,30.35 U4.16
PB1: length 48.8
  TOP w0.254: U1.36 v1(55.05,59.13) ; v1(70.83,34.86) 72.53,34.86 80.12,27.27 U5.5
  BOTTOM w0.254: v1(55.05,59.13) 56.21,59.13 57.7,57.65 57.7,49.87 65.67,41.9 65.67,37.4 68.21,34.86 v1(70.83,34.86)
PC4: length 34.5
  TOP w0.254: U1.33 53.54,47.7 58.23,43.01 58.23,33.39 62.4,29.22 U4.2
PC5: length 33
  TOP w0.254: U4.1 63.42,29.87 58.81,34.48 58.81,43.14 54.05,47.91 U1.34
PD8: length 18.5
  TOP w0.254: U1.55 79.65,61.09 J19.8
PD9: length 19.4
  TOP w0.254: J19.7 77.61,61.59 U1.56
PD10: length 20.2
  TOP w0.254: J19.6 75.57,62.09 U1.57
PD11: length 21
  TOP w0.254: J19.5 73.53,62.59 U1.58
PD12: length 22.4
  TOP w0.254: U1.59 72.38,63.09 77.13,67.83 77.13,68.72 J19.4
PD13: length 24.3
  TOP w0.254: J19.3 76.54,70.68 76.54,67.98 72.15,63.59 U1.60
PD14: length 26.2
  TOP w0.254: U1.61 71.89,64.09 75.96,68.16 75.96,72.63 J19.2
PD15: length 28.1
  TOP w0.254: U1.62 71.67,64.59 75.4,68.31 75.4,74.61 J19.1
PE4: length 178.9
  TOP w0.254: v1(42.58,81.67) 43.73,80.53 43.73,70.8 44.44,70.09 U1.3 ; J12.2 96.35,86.86 96.71,86.5 96.71,61.25 J13.2 ; v1(20.46,79.34) 19.9,79.34 19.88,79.36 17.13,79.36 13.09,75.32 J11.2 J10.2 ; J9.2 4.18,65.6 3.82,65.95 3.82,85.23 J8.2
  BOTTOM w0.254: J9.2 12.69,65.6 13.09,66 J11.2 ; J12.2 93.45,86.86 92.61,86.02 53.86,86.02 52.72,87.16 48.07,87.16 v1(42.58,81.67) 40.25,79.34 v1(20.46,79.34)
PE5: length 26.3
  TOP w0.254: U1.4 v1(50.15,69.59) ; v1(47.79,75.27) 47.79,85.97 48.92,87.1 Q1.1
  BOTTOM w0.254: v1(47.79,75.27) 47.79,71.95 v1(50.15,69.59)
PE12: length 23.2
  TOP w0.254: U1.43 v1(58.55,59.15)
  BOTTOM w0.254: v1(58.55,59.15) 58.55,50.17 J23.1
PE13: length 43.4
  TOP w0.254: U5.2 80.07,29.22 75.48,33.82 75.48,42.68 71.89,46.27 63.59,46.27 59.05,50.81 U1.44
PE14: length 42.5
  TOP w0.254: U5.1 80.39,29.87 76.26,34 76.26,42.94 72.35,46.85 63.79,46.85 59.55,51.1 U1.45
PE15: length 46.9
  TOP w0.254: v1(63.92,48.5) 71.64,48.5 87.55,32.6 U5.16 ; U1.46 v1(60.05,59.13)
  BOTTOM w0.254: v1(60.05,59.13) 60.05,52.38 v1(63.92,48.5)
SPI2_MISO: length 19.8
  TOP w0.254: U1.53 73.19,60.09 76.62,56.65 79.77,56.65 80.33,57.21 J21.2
SPI2_MOSI: length 14.8
  TOP w0.254: J21.1 75.94,60.59 U1.54
SPI2_SCK: length 21.7
  TOP w0.254: J21.3 80.2,56.07 76.37,56.07 72.85,59.59 U1.52
SWCLK: length 5.7
  TOP w0.254: R3.1 65.62,73.75 65.13,74.23 62.4,74.23 62.05,73.88 U1.76
SWDIO: length 3.6
  TOP w0.254: R2.1 65.62,67.98 65.16,68.43 65.16,69.17 64.75,69.59 U1.72
TIM1_CH1: length 18.1
  TOP w0.254: U1.40 57.05,49.38 61.91,44.51 J14.1
TIM1_CH2: length 26.6
  TOP w0.254: U1.42 58.05,50.97 63.35,45.67 70.87,45.67 72.83,43.7 J15.1
UART5_RX: length 10.2
  TOP w0.254: U1.83 58.55,74.19 60.49,76.14 60.49,80.21 60.94,80.66 J18.2
UART5_TX: length 6.3
  TOP w0.254: U1.80 60.05,74.12 62.32,76.39 J18.1
USART2_RX: length 9.7
  TOP w0.254: U1.87 56.55,80.24 56.96,80.66 J17.2
USART2_TX: length 6
  TOP w0.254: U1.86 57.05,76.55 J17.1
N01350: length 25.8
  TOP w0.254: C10.1 36.22,77.1 36.22,77.1 Y1.1 40.63,77.1 42.58,75.15 42.58,65.42 42.96,65.04 45.99,65.04 46.54,65.59 U1.12
N01406: length 16.3
  TOP w0.254: C11.1 36.22,67.09 36.22,67.1 Y1.2 40.04,67.1 42.68,64.45 46.11,64.45 46.75,65.09 U1.13
N02191: length 2.5
  TOP w0.254: C9.1 65.62,70.09 65.61,70.09 U1.73
N02195: length 2.3
  TOP w0.254: U1.49 61.55,55.76 61.56,55.75 C8.1
N04292: length 2.2
  TOP w0.254: U1.94 53.05,74.3 53.05,74.3 R1.2
N05431: length 5
  TOP w0.254: J1.1 70.45,67.98 R2.2
N05435: length 4.9
  TOP w0.254: R3.2 70.83,73.75 J1.2
N06205: length 81.7
  TOP w1.524: 18.99,10.33 16.45,7.79 J2.1 ; 18.99,10.33 27.26,10.33 C12.1 31.63,5.95 F1.1 35.09,13.04 35.09,27.22 33.28,29.02 U2.1 ; 18.99,10.33 19.01,10.35 19.01,27.19 17.18,29.02 U3.1
N06618: length 20.5
  TOP w1.016: U2.2 28.92,33.2 31.81,36.1 L1.1 31.81,45.82 D1.1
N06726: length 20.6
  TOP w1.016: D2.1 15.89,45.8 L2.1 15.89,36.1 12.76,32.97 U3.2
N07337: length 33.6
  TOP w0.508: 49.87,94.91 53.06,94.91 53.06,94.91 D3.1 D4.1 D5.1 D6.1 D7.1 D8.1 D9.1 D10.1
N09789: length 2.3
  TOP w0.254: U1.37 55.54,55.75 55.54,55.75 R12.1
N11361: length 20.6
  TOP w0.381: U5.10 88.79,25.97 89.29,25.46
  TOP w1.016: J5.2 86.83,13.22 89.29,15.68 89.29,25.46
N16090: length 3.1
  TOP w0.254: D10.2 R11.2
N16092: length 3.1
  TOP w0.254: D9.2 R10.2
N16094: length 3.1
  TOP w0.254: D8.2 R9.2
N16096: length 3.1
  TOP w0.254: D7.2 R8.2
N16098: length 3.1
  TOP w0.254: D6.2 R7.2
N16100: length 3.1
  TOP w0.254: D5.2 R6.2
N16102: length 3.1
  TOP w0.254: D4.2 R5.2
N16104: length 3.1
  TOP w0.254: D3.2 R4.2
N18815: length 15.2
  TOP w0.381: 72.48,25.39 71.9,25.97 U4.10
  TOP w1.016: J4.2 72.48,16.01 72.48,25.39
N18883: length 16.9
  TOP w0.381: U4.7 63.56,25.97 63.16,25.57
  TOP w1.016: J4.1 62.88,18.3 62.14,19.04 62.14,24.55 63.16,25.57
N19043: length 49.3
  TOP w0.254: v1(72.83,30.16) 71.89,29.22 U4.15 ; R23.1 v1(42.25,49.85)
  BOTTOM w0.254: v1(42.25,49.85) 42.25,45.91 43.55,44.62 46.65,44.62 55.33,35.93 55.33,30.16 56.25,29.25 58.15,29.25 59.07,30.16 v1(72.83,30.16)
N19047: length 61.1
  TOP w0.254: U5.15 88.89,29.22 89.47,29.81 v1(89.47,31.08) ; R24.1 v1(43.97,45.95)
  BOTTOM w0.254: v1(89.47,31.08) 88.33,32.22 75.83,32.22 74.82,31.2 70.45,31.2 64.43,37.22 64.43,42.15 62.75,43.83 54.47,43.83 53.43,42.79 51.63,42.79 48.46,45.95 v1(43.97,45.95)
N19140: length 5.7
  TOP w0.381: 65.06,24.6 U4.8
  TOP w1.016: R21.1 65.06,21.34 65.06,24.6
N19165: length 8.9
  TOP w0.381: 81.75,24.39 U5.8
  TOP w1.016: 81.75,24.39 77.46,20.1 R22.1
N19192: length 19.8
  TOP w0.381: 78.58,25.97 U5.7
  TOP w1.016: 78.58,25.97 73.98,21.37 73.98,18.94 74.61,18.3 J5.1
N19500: length 2.3
  TOP w0.381: U4.11 72.4,26.62 72.41,26.63 C18.2
N19504: length 4.5
  TOP w0.381: U4.12 72.13,27.27 72.45,27.6 73.94,27.6 74.83,26.71 C18.1
N19667: length 4.8
  TOP w0.381: U5.12 89.02,27.27 89.37,27.62 90.83,27.62 91.74,26.71 C19.1
N19671: length 2.5
  TOP w0.381: C19.2 89.33,26.63 89.32,26.62 U5.11
N19839: length 2.2
  TOP w0.381: U4.14 72.37,28.57 72.38,28.56 C20.1
N19843: length 2.5
  TOP w0.381: C21.1 89.3,28.59 89.29,28.57 U5.14
N24901: length 19.9
  TOP w0.254: U4.6 60.88,26.62 v1(57.16,30.34)
  BOTTOM w0.254: v1(57.16,30.34) 59.56,32.74 59.56,36.45 J14.2
N24909: length 17.4
  TOP w0.254: v1(73.55,32.27) 74.16,32.27 79.8,26.62 U5.6
  BOTTOM w0.254: v1(73.55,32.27) 72.83,32.98 J15.2
N35338: length 15.6
  TOP w0.254: J22.2 56.45,34.1 61.98,28.57 U4.3
N35360: length 18.6
  TOP w0.254: U5.3 79.78,28.57 69.56,38.8 J23.2

## Copper pours and planes (outline as drawn; the poured copper is in the pictures)
3V3 on TOP: 51.85,68.77 51.85,62.09 60.34,62.09 60.34,68.77
3V3 on BOTTOM: 53.56,67.48 53.56,62.75 58.43,62.75 58.43,67.48
11V1 on BOTTOM: 66.74,21.58 67.02,21.3 87.9,21.3 88.18,21.58 88.18,22.14 87.82,22.49 67.02,22.49 66.74,22.21
0 on BOTTOM: 2.54,2.54 2.54,97.46 97.46,97.46 97.46,2.54 ; 2 cut-outs
N19140 on TOP (solid shape): 65.78,25.1 65.17,24.44 65.06,24.4 64.95,24.44 64.33,25.1 65.06,25.37
N19165 on TOP (solid shape): 82.47,25.1 81.86,24.41 81.75,24.37 81.63,24.41 81.02,25.1 81.75,25.37
N19192 on TOP (solid shape): 78.83,25.53 78.07,25.97 78.83,26.41 79.31,26.14 79.4,25.97 79.31,25.81

Small or netless copper shapes (teardrops, artwork), in the pictures only: 3 on TOP
